# EAGLE board control v1 (EAGLE 6.1)
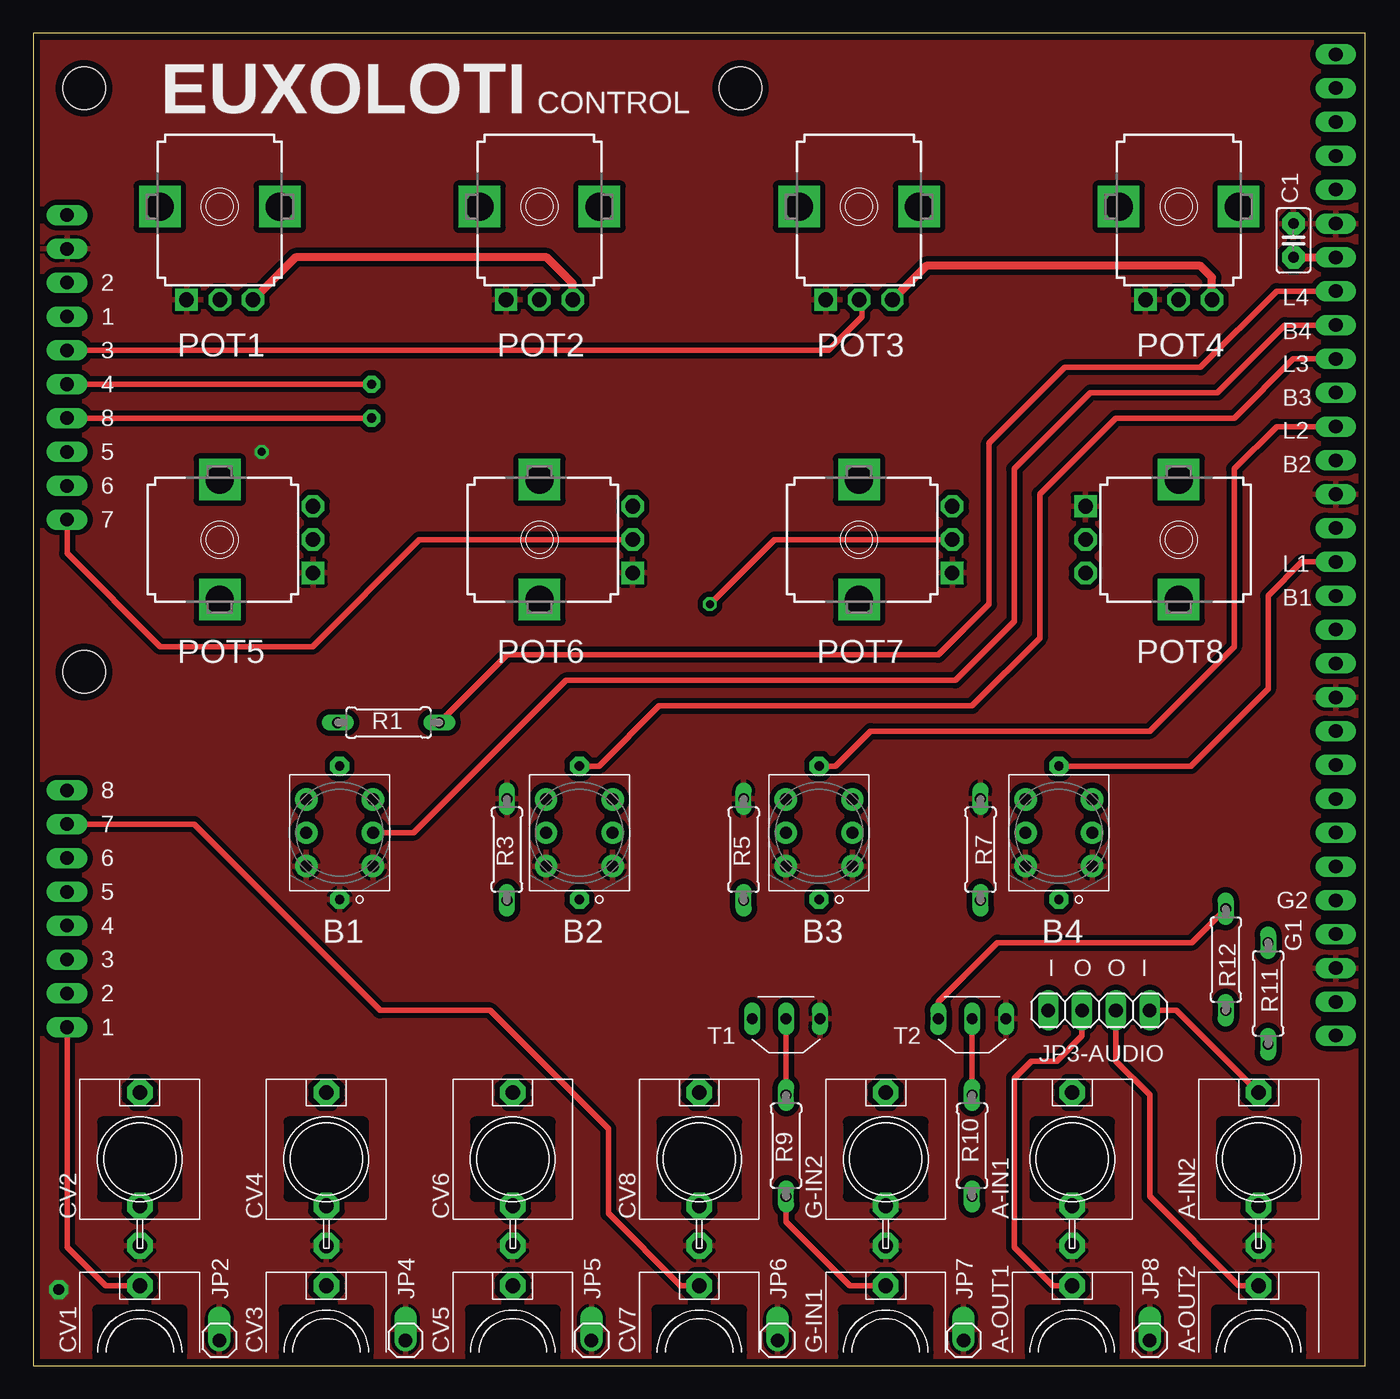
[diagram p0: board, top side]
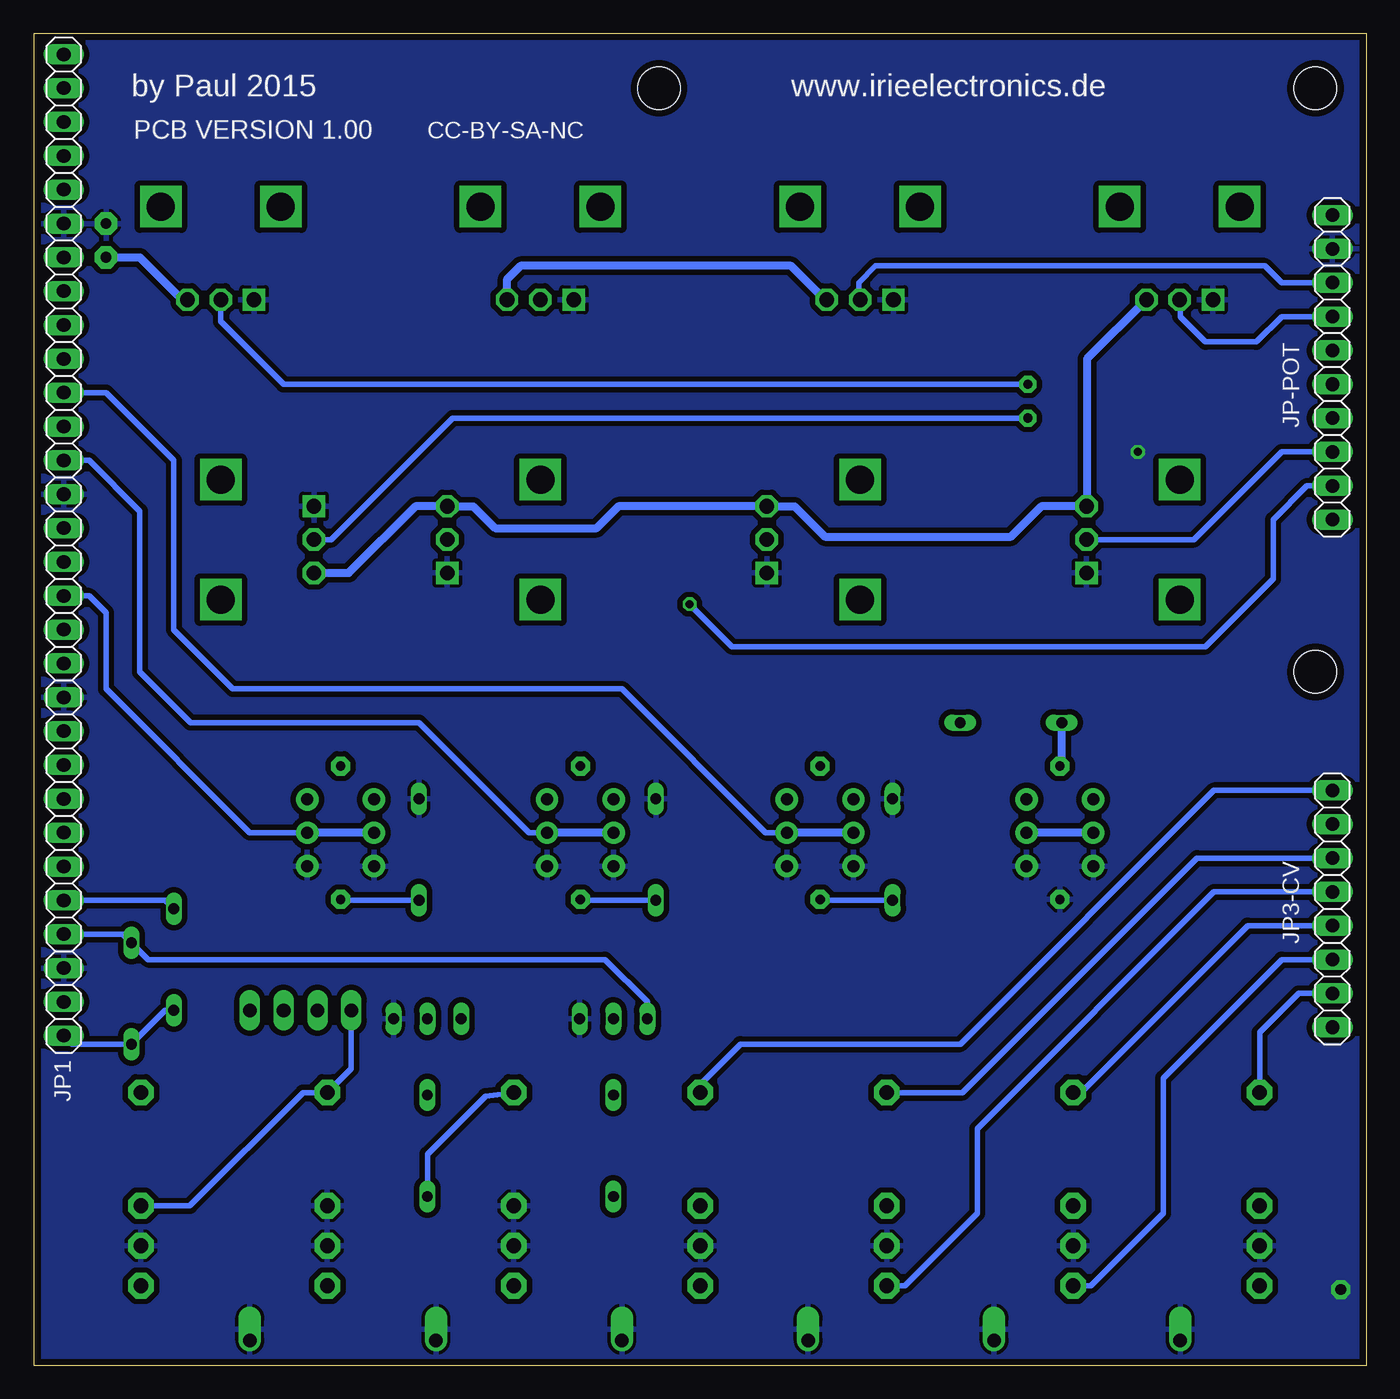
[diagram p1: board, bottom side, seen from below]

Size 100 x 100 mm. Coordinates in mm from the lower left corner, seen from the top.
Outline: 0,0 100,0 100,100 0,100 0,0
Copper layers (1*2*15*16): Top 0.035mm / dielectric 0.2mm / Route2 0.035mm / dielectric 1.2mm / Route15 0.035mm / dielectric 0.2mm / Bottom 0.035mm
Design rules: minimum track width 6mil, minimum drill 12mil, track to track 6mil, track to pad 8mil, pad to pad 12mil, via to via 6mil, smd to smd 0mil, copper to edge 20mil, drill to drill 10mil, minimum pad ring 6mil, minimum via ring 6mil, stop-mask expansion 0mil, vias tented up to drill 100mil, thermal gap 10mil
Holes 3.2 mm at 3.81,95.89 53.1,95.89 3.81,52.07

## Footprints (pad centres in the part's own frame; a part is rotated, then mirrored left to right if it is on the bottom)
WQP-PJ301M-12_JACK = drill 1.1 pad 1.93 octagon: P$1_TIP 0,5; P$2_SWITCH 0,-3.5; P$3_SLEEVE 0,-6.5
WQP-PJ301M-12_JACK' = drill 1.1 pad 1.93 octagon: P$1_TIP 0,5
LP4OA1PBCT = drill 0.7 pad 1.422 octagon: L1 5,0; L2 -5,0 | drill 0.9 pad 1.676: P1 2.5,2.5; P2 0,2.5; P3 -2.5,2.5; P4 2.5,-2.5; P5 0,-2.5; P6 -2.5,-2.5
C025-025X050 = drill 0.813 pad 1.676 octagon: 1 -1.27,0; 2 1.27,0
1X30 = drill 1.016 long: 1 -36.83,0; 2 -34.29,0; 3 -31.75,0; 4 -29.21,0; 5 -26.67,0; 6 -24.13,0; 7 -21.59,0; 8 -19.05,0; 9 -16.51,0; 10 -13.97,0; 11 -11.43,0; 12 -8.89,0; 13 -6.35,0; 14 -3.81,0; 15 -1.27,0; 16 1.27,0; 17 3.81,0; 18 6.35,0; 19 8.89,0; 20 11.43,0; 21 13.97,0; 22 16.51,0; 23 19.05,0; 24 21.59,0; 25 24.13,0; 26 26.67,0; 27 29.21,0; 28 31.75,0; 29 34.29,0; 30 36.83,0
1X01 = drill 1.016 pad 1.676 offset: 1 0,0
1X04 = drill 1.016 long: 1 -3.81,0; 2 -1.27,0; 3 1.27,0; 4 3.81,0
1X08 = drill 1.016 long: 1 -8.89,0; 2 -6.35,0; 3 -3.81,0; 4 -1.27,0; 5 1.27,0; 6 3.81,0; 7 6.35,0; 8 8.89,0
1X10 = drill 1.016 long: 1 -11.43,0; 2 -8.89,0; 3 -6.35,0; 4 -3.81,0; 5 -1.27,0; 6 1.27,0; 7 3.81,0; 8 6.35,0; 9 8.89,0; 10 11.43,0
9MM_SNAP-IN_POT = drill 1.1 pad 1.676 square: 1 -2.5,-7 | drill 1.1 pad 1.676 octagon: 2 0,-7; 3 2.5,-7 | drill 2.1 pad 2.8 square: CHASSIS1 -4.5,0; CHASSIS2 4.5,0
0207/7 = drill 0.813 long: 1 -3.81,0; 2 3.81,0
TO92 = drill 0.813 long: 1 2.54,0; 2 0,0; 3 -2.54,0

## Placement (x,y rotation side)
A-IN1  THONKICONNNEW  [WQP-PJ301M-12_JACK]  78,15.5 0 top
A-IN2  THONKICONNNEW  [WQP-PJ301M-12_JACK]  92,15.5 0 top
A-OUT1  THONKICONNNEW  [WQP-PJ301M-12_JACK']  78,1 0 top
A-OUT2  THONKICONNNEW  [WQP-PJ301M-12_JACK']  92,1 0 top
B1  LP4OA1PBCTG  [LP4OA1PBCT]  23,40 90 top
B2  LP4OA1PBCTG  [LP4OA1PBCT]  41,40 90 top
B3  LP4OA1PBCTG  [LP4OA1PBCT]  59,40 90 top
B4  LP4OA1PBCTG  [LP4OA1PBCT]  77,40 90 top
C1  100n  [C025-025X050]  94.61,84.45 270 top
CV1  THONKICONNNEW  [WQP-PJ301M-12_JACK']  8,1 0 top
CV2  THONKICONNNEW  [WQP-PJ301M-12_JACK]  8,15.5 0 top
CV3  THONKICONNNEW  [WQP-PJ301M-12_JACK']  22,1 0 top
CV4  THONKICONNNEW  [WQP-PJ301M-12_JACK]  22,15.5 0 top
CV5  THONKICONNNEW  [WQP-PJ301M-12_JACK']  36,1 0 top
CV6  THONKICONNNEW  [WQP-PJ301M-12_JACK]  36,15.5 0 top
CV7  THONKICONNNEW  [WQP-PJ301M-12_JACK']  50,1 0 top
CV8  THONKICONNNEW  [WQP-PJ301M-12_JACK]  50,15.5 0 top
G-IN1  THONKICONNNEW  [WQP-PJ301M-12_JACK']  64,1 0 top
G-IN2  THONKICONNNEW  [WQP-PJ301M-12_JACK]  64,15.5 0 top
JP1  [1X30]  97.79,61.59 90 bottom
JP2  [1X01]  13.97,1.91 0 top
JP3-AUDIO  [1X04]  80.01,26.67 0 top
JP3-CV  [1X08]  2.54,34.29 90 bottom
JP4  [1X01]  27.94,1.91 0 top
JP5  [1X01]  41.91,1.91 0 top
JP6  [1X01]  55.88,1.91 0 top
JP7  [1X01]  69.85,1.91 0 top
JP8  [1X01]  83.82,1.91 0 top
JP-POT  [1X10]  2.54,74.93 270 bottom
POT1  10K  [9MM_SNAP-IN_POT]  14,87 0 top
POT2  10K  [9MM_SNAP-IN_POT]  38,87 0 top
POT3  10K  [9MM_SNAP-IN_POT]  62,87 0 top
POT4  10K  [9MM_SNAP-IN_POT]  86,87 0 top
POT5  10K  [9MM_SNAP-IN_POT]  14,62 90 top
POT6  10K  [9MM_SNAP-IN_POT]  38,62 90 top
POT7  10K  [9MM_SNAP-IN_POT]  62,62 90 top
POT8  10K  [9MM_SNAP-IN_POT]  86,62 270 top
R1  34,8R  [0207/7]  26.67,48.26 180 top
R3  34,8R  [0207/7]  35.56,38.73 90 top
R5  34,8R  [0207/7]  53.34,38.73 90 top
R7  34,8R  [0207/7]  71.12,38.73 90 top
R9  100K  [0207/7]  56.52,16.51 90 top
R10  100K  [0207/7]  70.48,16.51 90 top
R11  10K  [0207/7]  92.71,27.94 270 top
R12  10K  [0207/7]  89.53,30.48 270 top
T1  2N3904  [TO92]  56.52,26.04 180 top
T2  2N3904  [TO92]  70.48,26.04 180 top

## Library data of the parts
A-IN1 A-IN2 CV2 CV4 CV6 CV8 G-IN2 POT1-POT8 = MusicThingModular
A-OUT1 A-OUT2 CV1 CV3 CV5 CV7 G-IN1 = MusicThingModular mod
B1-B4 = og-switch
C1 R1 R3 R5 R7 R9-R12 = resistor-mod
JP1 JP2 JP3-AUDIO JP3-CV JP4-JP8 = pinhead
JP-POT = pinhead 2
T1 T2 = transistor

## Nets
+3V3: C1.2 JP1.24 POT1.3 POT2.3 POT3.3 POT4.3 POT5.3 POT6.3 POT7.3 POT8.3
AUDIO_IN1: A-IN1.P$1_TIP A-IN2.P$2_SWITCH JP3-AUDIO.1
AUDIO_IN2: A-IN2.P$1_TIP JP3-AUDIO.4
AUDIO_OUT1: A-OUT1.P$1_TIP JP3-AUDIO.2
AUDIO_OUT2: A-OUT2.P$1_TIP JP3-AUDIO.3
B1: B1.P2 B1.P5 JP1.22
B2: B2.P2 B2.P5 JP1.20
B3: B3.P2 B3.P5 JP1.18
B4: B4.P2 B4.P5 JP1.14
CV1: CV1.P$1_TIP JP3-CV.1
CV2: CV2.P$1_TIP JP3-CV.2
CV3: CV3.P$1_TIP JP3-CV.3
CV4: CV4.P$1_TIP JP3-CV.4
CV5: CV5.P$1_TIP JP3-CV.5
CV6: CV6.P$1_TIP JP3-CV.6
CV7: CV7.P$1_TIP JP3-CV.7
CV8: CV8.P$1_TIP JP3-CV.8
GATE1: JP1.4 R11.1 T1.1
GATE2: JP1.5 R12.1 T2.1
GND: A-IN1.P$2_SWITCH A-IN1.P$3_SLEEVE A-IN2.P$3_SLEEVE B1.L2 B1.P3 B1.P6 B2.P3 B2.P6 B3.P3 B3.P6 B4.P3 B4.P6 C1.1 CV2.P$3_SLEEVE CV4.P$3_SLEEVE CV6.P$3_SLEEVE CV8.P$3_SLEEVE G-IN2.P$2_SWITCH G-IN2.P$3_SLEEVE JP1.3 JP1.11 JP1.17 JP1.25 JP2.1 JP4.1 JP5.1 JP6.1 JP7.1 JP8.1 JP-POT.2 POT1.1 POT2.1 POT3.1 POT4.1 POT5.1 POT6.1 POT7.1 POT8.1 R3.2 R5.2 R7.2 T1.3 T2.3
L1: JP1.23 R1.1
L2: B2.L1 JP1.21
L3: B3.L1 JP1.19
L4: B4.L1 JP1.15
N$3: B2.L2 R3.1
N$4: B3.L2 R5.1
N$5: B1.L1 R1.2
N$6: B4.L2 R7.1
N$7: G-IN1.P$1_TIP R9.1
N$9: G-IN2.P$1_TIP R10.1
N$11: R9.2 T1.2
N$16: R10.2 T2.2
POT1: JP-POT.4 POT1.2
POT2: JP-POT.3 POT2.2
POT3: JP-POT.5 POT3.2
POT4: JP-POT.6 POT4.2
POT5: JP-POT.8 POT5.2
POT6: JP-POT.10 POT6.2
POT7: JP-POT.9 POT7.2
POT8: JP-POT.7 POT8.2
VDD: JP1.1 R11.2 R12.2

## Tracks (layer width: path | path; a pad name or v marks a point on that pad's centre or on a via)
+3V3
  Top 0.61: C1.2 JP1.24 | POT4.3 88.5,81.68 87.63,82.55 67.05,82.55 POT3.3 | POT1.3 19.68,83.19 38.55,83.19 40.5,81.23 POT2.3
  Bottom 0.61: POT4.3 88.89,80 92.08,83.19 C1.2 | POT3.3 64.5,81.55 63.5,82.55 43.18,82.55 40.63,80 POT2.3 | POT8.3 76.39,59.5 71.39,64.5 POT7.3 67.04,64.5 65.41,62.87 57.78,62.87 56.15,64.5 POT6.3 42.91,64.5 40.64,62.23 26.67,62.23 24.4,64.5 POT5.3 20.93,65.2 20.95,65.22 20.95,75.56 16.52,80 POT1.3
AUDIO_IN1
  Bottom 0.406: JP3-AUDIO.1 76.2,22.3 A-IN1.P$1_TIP 79.83,20.5 88.33,12 A-IN2.P$2_SWITCH
AUDIO_IN2
  Top 0.406: JP3-AUDIO.4 85.83,26.67 A-IN2.P$1_TIP
AUDIO_OUT1
  Top 0.406: JP3-AUDIO.2 78.74,24.77 76.83,22.86 74.93,22.86 73.66,21.59 73.66,8.89 76.55,6 77.47,6 77.82,6 A-OUT1.P$1_TIP
AUDIO_OUT2
  Top 0.406: JP3-AUDIO.3 81.28,22.86 83.82,20.32 83.82,12.7 90.52,6 A-OUT2.P$1_TIP
B1
  Top 0.406: B1.P5 28.57,40 40.01,51.44 69.22,51.44 73.66,55.88 73.66,67.31 79.38,73.03 88.9,73.03 93.98,78.11 JP1.22
  Bottom 0.61: B1.P2 B1.P5
B2
  Bottom 0.406: JP1.20 94.61,73.03 89.53,67.94 89.53,55.24 85.09,50.8 55.88,50.8 45.09,40.01 B2.P5
  Bottom 0.61: B2.P2 B2.P5
B3
  Bottom 0.406: JP1.18 95.89,67.94 92.08,64.14 92.08,52.07 88.27,48.26 71.12,48.26 62.87,40.01 B3.P5
  Bottom 0.61: B3.P2 B3.P5
B4
  Bottom 0.406: B4.P5 83.18,40 83.82,40.01 94.61,50.8 94.61,56.52 95.89,57.78 JP1.14
  Bottom 0.61: B4.P2 B4.P5
CV1
  Top 0.406: CV1.P$1_TIP 5.43,6 2.54,8.89 JP3-CV.1
CV2
  Bottom 0.406: CV2.P$1_TIP 8,25.02 5.08,27.94 JP3-CV.2
CV3
  Bottom 0.406: JP3-CV.3 6.35,30.48 15.24,21.59 15.24,11.43 20.67,6 CV3.P$1_TIP
CV4
  Bottom 0.406: CV4.P$1_TIP 21.67,20.24 8.89,33.02 JP3-CV.4
CV5
  Bottom 0.406: JP3-CV.5 11.43,35.56 29.21,17.78 29.21,11.43 34.64,6 CV5.P$1_TIP
CV6
  Bottom 0.406: JP3-CV.6 12.7,38.1 30.3,20.5 CV6.P$1_TIP
CV7
  Top 0.406: CV7.P$1_TIP 48.61,6 43.18,11.43 43.18,17.78 34.29,26.67 26.04,26.67 12.06,40.64 JP3-CV.7
CV8
  Bottom 0.406: JP3-CV.8 11.43,43.18 30.48,24.13 46.99,24.13 49.98,21.14 CV8.P$1_TIP
GATE1
  Bottom 0.406: T1.1 53.98,27.3 57.15,30.48 91.44,30.48 R11.1 93.34,32.38 JP1.4
GATE2
  Top 0.406: T2.1 67.94,27.3 72.39,31.75 87,31.75 R12.1
  Bottom 0.406: R12.1 90.17,34.92 JP1.5
GND  (via drill 0.6 pad 1.02, 0.8 pad 1.42)
  other vias: 1.91,5.71 17.14,68.58
  pour Bottom (isolate 0.406): 0,99.99 0,0 99.99,0 99.99,99.99
  pour Top (isolate 0.406): 0,99.99 0,0 99.99,0 99.99,99.99
L1
  Top 0.406: JP1.23 93.34,80.64 87.63,74.93 77.47,74.93 71.75,69.22 71.75,57.15 67.94,53.34 35.56,53.34 R1.1
L2
  Top 0.406: B2.L1 42.46,45 46.99,49.53 70.48,49.53 75.56,54.61 75.56,65.41 81.28,71.12 90.17,71.12 94.61,75.56 JP1.21
L3
  Top 0.406: B3.L1 60.24,45 62.87,47.62 83.82,47.62 90.17,53.98 90.17,67.31 93.34,70.48 JP1.19
L4
  Top 0.406: B4.L1 86.91,45 92.71,50.8 92.71,57.78 95.25,60.33 JP1.15
N$3
  Bottom 0.406: R3.1 40.92,34.92 B2.L2
N$4
  Bottom 0.406: R5.1 58.92,34.92 B3.L2
N$5
  Bottom 0.61: B1.L1 22.86,45 R1.2
N$6
  Bottom 0.406: R7.1 76.92,34.92 B4.L2
N$7
  Top 0.406: G-IN1.P$1_TIP 61.31,6 56.52,10.79 R9.1
N$9
  Bottom 0.406: G-IN2.P$1_TIP 66.12,20.24 70.48,15.88 R10.1
N$11
  Top 0.406: T1.2 R9.2
N$16
  Top 0.406: R10.2 T2.2
POT1
  Bottom 0.406: JP-POT.4 6.35,78.74 8.26,76.83 12.06,76.83 13.97,78.74 13.97,79.97 POT1.2
POT2
  Bottom 0.406: JP-POT.3 6.35,81.28 7.62,82.55 36.83,82.55 38.1,81.28 38.1,80.1 POT2.2
POT3
  Top 0.406: POT3.2 62.23,79.77 62.23,78.74 59.69,76.2 JP-POT.5
POT4  (via drill 0.7 pad 1.27)
  Top 0.406: v25.4,73.66 JP-POT.6
  Bottom 0.406: POT4.2 86,78.38 81.28,73.66 v25.4,73.66
POT5
  Bottom 0.406: POT5.2 12.93,62 6.35,68.58 JP-POT.8
POT6
  Top 0.406: POT6.2 28.98,62 20.95,53.98 9.53,53.98 2.54,60.96 JP-POT.10
POT7  (via drill 0.6 pad 1.02)
  Top 0.406: POT7.2 55.65,62 v50.8,57.15
  Bottom 0.406: v50.8,57.15 47.62,53.98 12.06,53.98 6.99,59.05 6.99,63.5 4.45,66.04 JP-POT.9
POT8  (via drill 0.7 pad 1.27)
  Top 0.406: JP-POT.7 v25.4,71.12
  Bottom 0.406: v25.4,71.12 68.58,71.12 77.7,62 POT8.2
VDD
  Bottom 0.406: R12.2 90.17,26.67 R11.2 97.16,24.13 JP1.1

## Text on the board
tNames: EUXOLOTI | CONTROL | 2 | L4 | 1 | B4 | 3 | L3 | 4 | B3 | 8 | L2 | 5 | B2 | 6 | 7 | L1 | B1 | 8 | 7 | 6 | 5 | G2 | 4 | G1 | 3 | I | O | O | I | 2 | 1
bNames: www.irieelectronics.de | by Paul 2015 | CC-BY-SA-NC | PCB VERSION 1.00